# Altium PCB Booster_USER_IFC_W5500.PcbDoc (part 1 of 2)
Units mm, origin at the board's own origin, x right, y up, seen from the top; angles counter-clockwise.
Board outline 78 x 45 mm, 2 copper layers (Top Layer, Bottom Layer), stack 1.571 mm thick; 87 components, 93 nets, 348 pads, 108 vias.
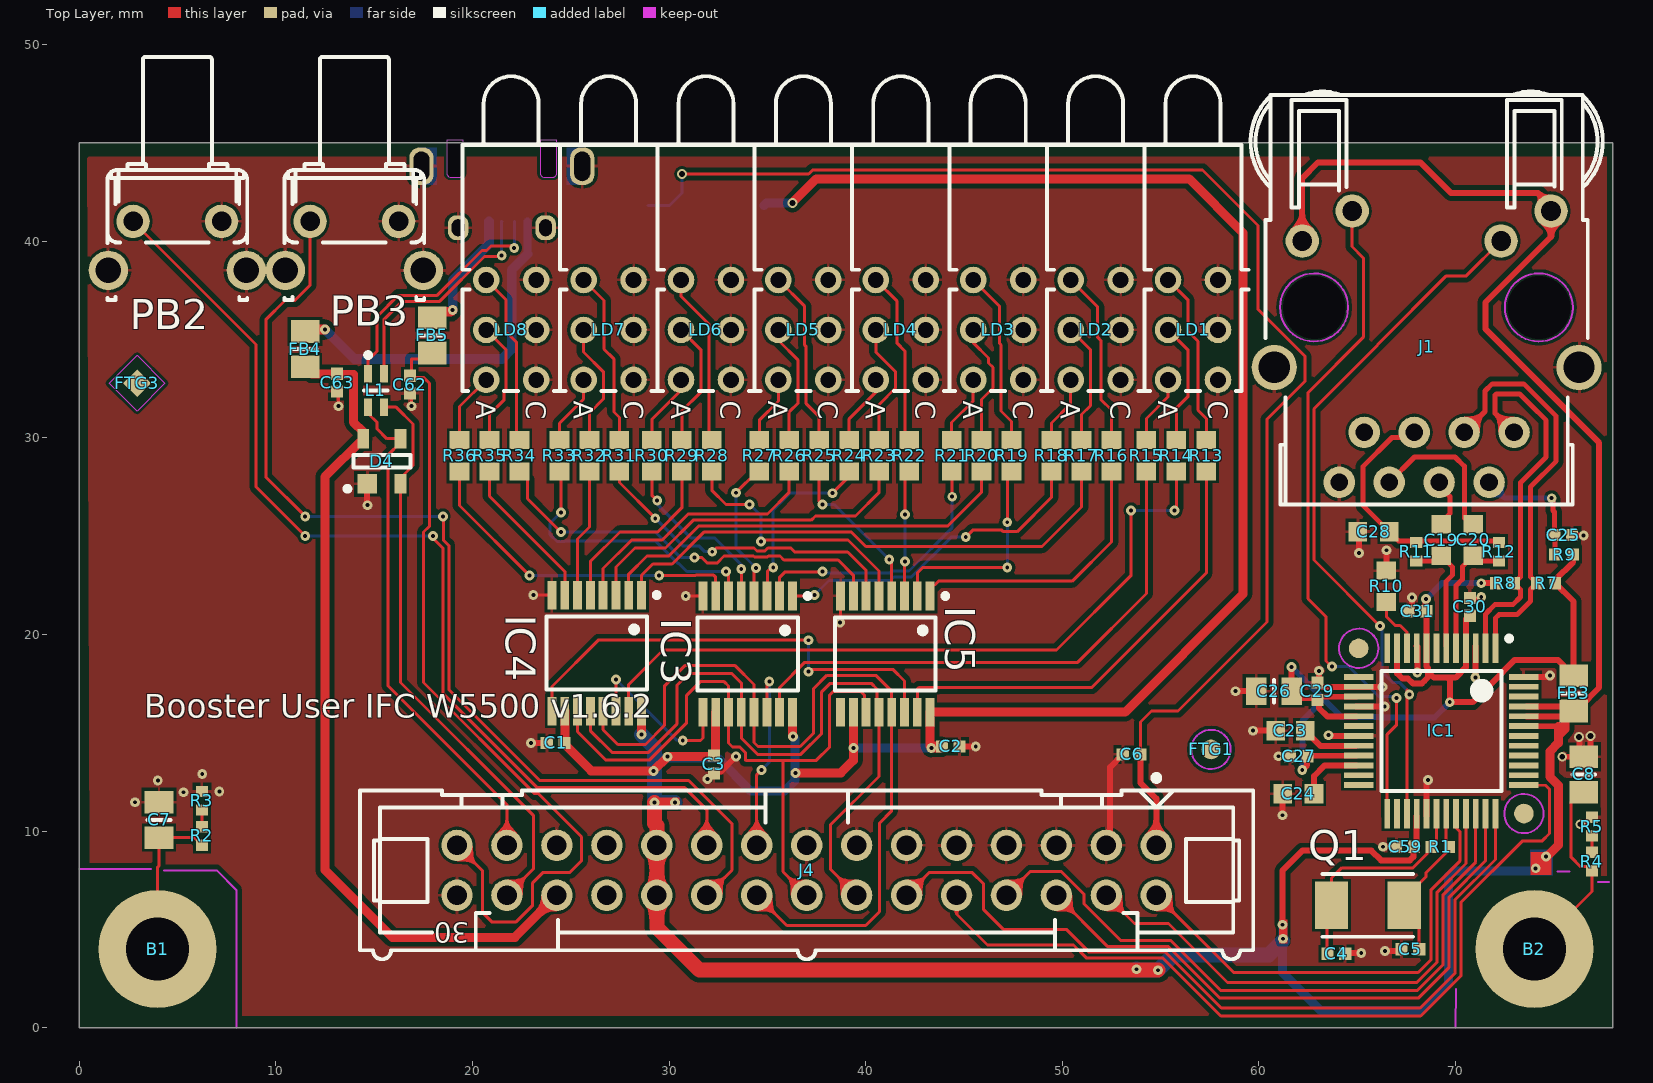
[diagram p0: Top Layer view]
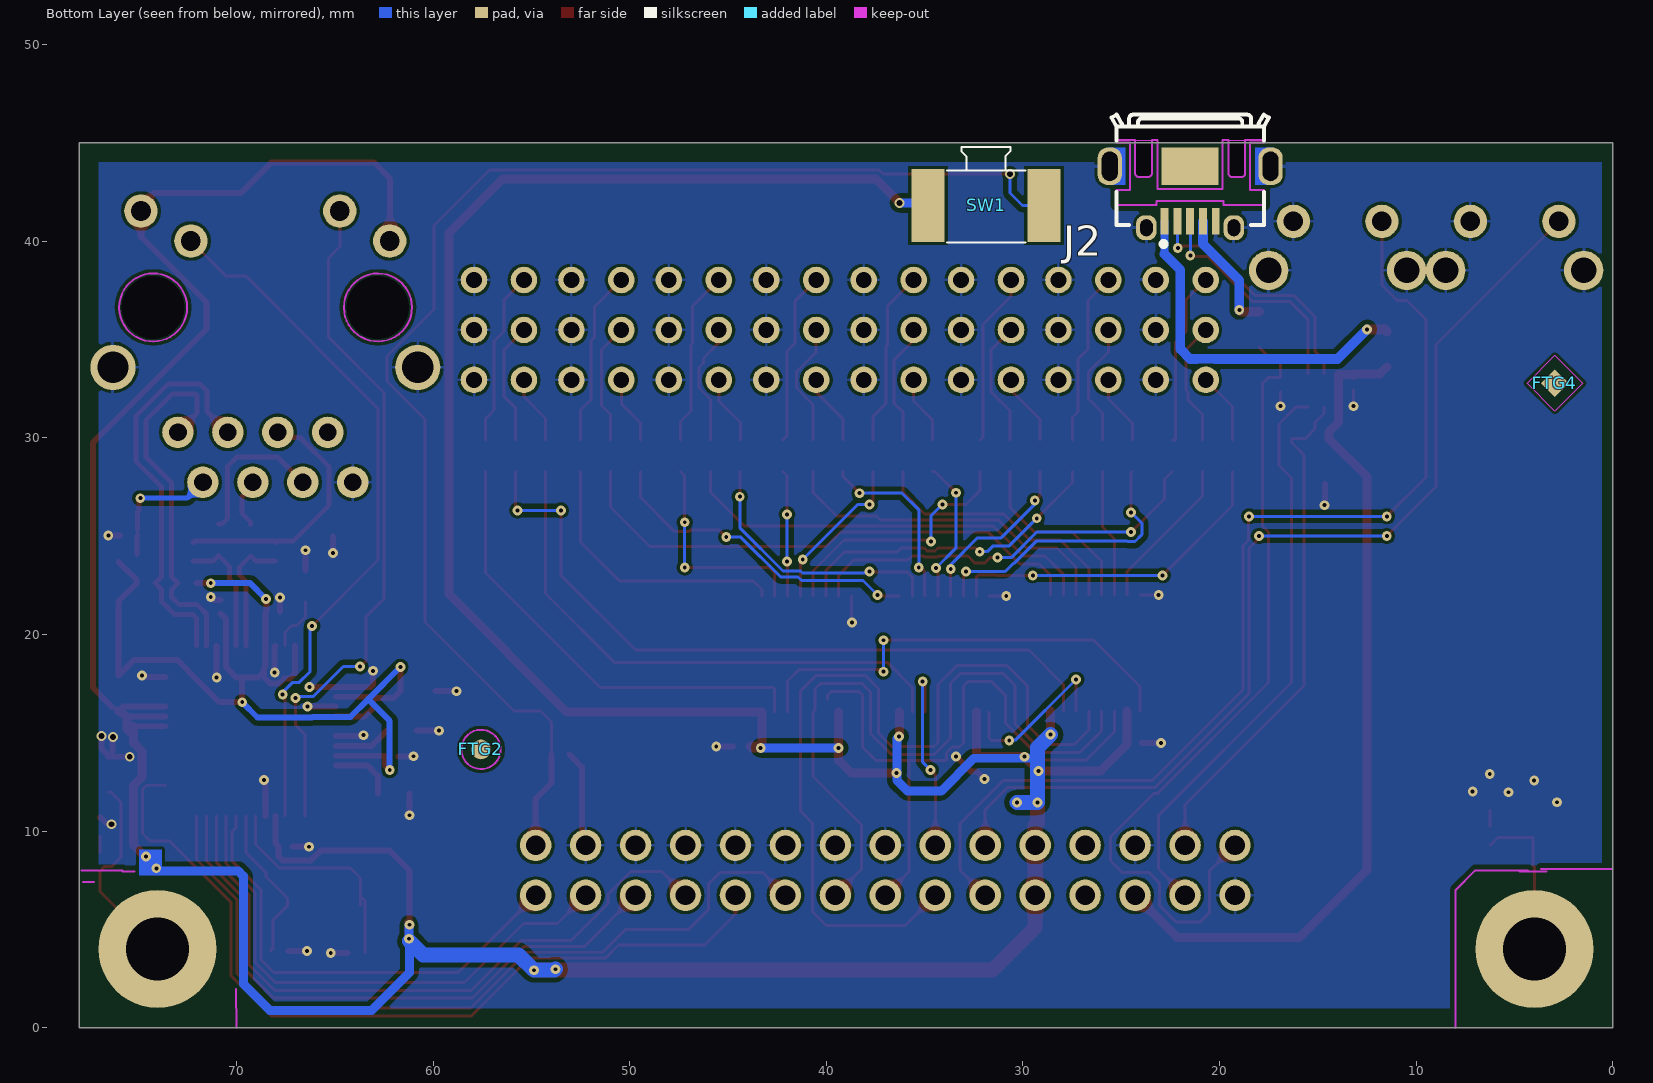
[diagram p1: Bottom Layer view, seen from below]
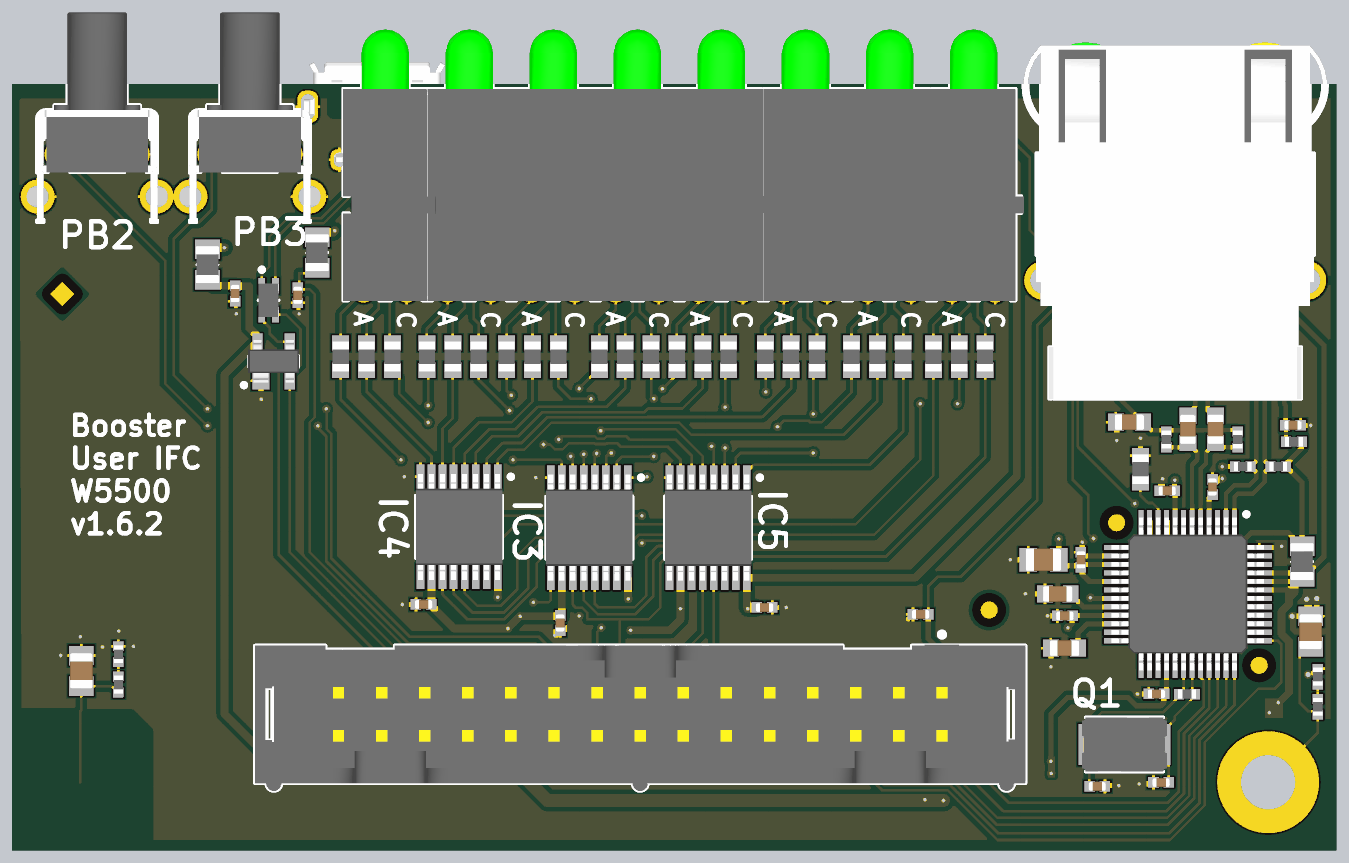
[diagram p2: 3D render of the assembled board from above, using the file's embedded part models]

## Layer stack, top to bottom
Top Solder: solder mask 0.0102, Solder Resist, Dk 3.5
Top Layer: signal copper 0.0356
Dielectric 1: dielectric 1.5, FR-4, Dk 4.8
Bottom Layer: signal copper 0.0356
Bottom Solder: solder mask 0.0102, Solder Resist, Dk 3.5

## Board outline
0,0 78,0 78,45 0,45

## Design rules (kind name [scope] priority, off if disabled: settings)
Clearance [All] p1: gap=0.152 ignorepadtopadclearanceinfootprint=FALSE except(0: Arc-Hole Track-Hole SMDPad-Hole THPad-Hole Via-Hole Fill-Hole Poly-Hole Region-Hole Text-Hole; 0.254: Track-Poly Poly-Poly)
DiffPairsRouting [All] p1: maxlimit=0.254 minlimit=0.254 mostfreqgap=0.254 toplayer_minwidth=0.254 toplayer_maxwidth=0.381 toplayer_prefwidth=0.381 bottomlayer_minwidth=0.254 bottomlayer_maxwidth=0.381 bottomlayer_prefwidth=0.381 maxuncoupledlength=12.7
HoleSize [All] p1: absolutevalues=TRUE maxlimit=5.08 minlimit=0.2 maxpercent=80.000 minpercent=20.000
MinimumSolderMaskSliver [All] p1: minsoldermaskwidth=0.025
PolygonConnect PolygonConnect_pad [IsPad] p1: connectstyle=Relief reliefconductorwidth=0.152 reliefentries=4 polygonreliefangle="90 Angle" airgapwidth=0.152
PolygonConnect [All] p2: connectstyle=Direct reliefconductorwidth=0.254 reliefentries=4 polygonreliefangle="45 Angle" airgapwidth=0.254
RoomDefinition Booster_USER_IFC_W5500 [InComponentClass('Booster_USER_IFC_W5500')] p1 off: confinementstyle=ConfineIn formatcopy=TRUE lockcomponents=FALSE outline 79.139,0.117 107.105,0.117 107.105,5.756 79.139,5.756
RoomDefinition U_LEDs [InComponentClass('U_LEDs')] p2 off: confinementstyle=ConfineIn formatcopy=TRUE lockcomponents=FALSE outline 81.557,48.796 10.818,48.796 10.818,-0.353 81.557,-0.353
RoomDefinition U_ETH_IFC [InComponentClass('U_ETH_IFC')] p3 off: confinementstyle=ConfineIn formatcopy=TRUE lockcomponents=FALSE outline 83.269,45.748 59,45.748 59,-0.861 83.269,-0.861
RoutingVias [All] p1: holewidth=0.711 width=0.5 viastyle="Through Hole" minholewidth=0.3 minwidth=0.5 maxholewidth=0.3 maxwidth=1.27
SilkToSilkClearance [All] p1: silktosilkclearance=0
SilkToSolderMaskClearance [IsPad] p1: minsilkscreentomaskgap=0 clearancetoexposedcopper=TRUE
SolderMaskExpansion [All] p1: expansion=0.102 istentingtop=FALSE
Width [All] p1: maxlimit=2.54 minlimit=0.152 preferedwidth=0.152
25 further rules are at their usual default settings.

## Classes and differential pairs
component class Booster_USER_IFC_W5500: B1 B2 C6 C7 C8 C62 C63 D4 FB4 FB5 FTG1 FTG2 FTG3 FTG4 J2 J4 L1 PB2 PB3 R2 R3 R4 R5 SW1
component class U_ETH_IFC: C4 C5 C19 C20 C23 C24 C25 C26 C27 C28 C29 C30 C31 C59 FB3 IC1 J1 Q1 R1 R7 R8 R9 R10 R11 R12
component class U_LEDs: C1 C2 C3 IC3 IC4 IC5 LD1 LD2 LD3 LD4 LD5 LD6 LD7 LD8 R13 R14 R15 R16 R17 R18 R19 R20 R21 R22 R23 R24 R25 R26 R27 R28 R29 R30 R31 R32 R33 R34 R35 R36
differential pair RJ45_TX: +RJ45_TX_P -RJ45_TX_N
differential pair RJ45_RX: +RJ45_RX_P -RJ45_RX_N
differential pair RJ45_RX_C: +RJ45_RX_C_P -RJ45_RX_C_N

## Components (designator, comment, footprint, x,y, rotation, side; value= is the part's Value field where it differs from the comment)
B1 "Plated Hole" MTG320_550#1 -7.214,2.032 r90 top
B2 "Plated Hole" MTG320_550#2 82.136,2.988 r90 top
C1 "100nF" CAPC1005X55N 24.235,14.478 r180 top
C2 "100nF" CAPC1005X55N 44.327,14.3 r0 top
C3 "100nF" CAPC1005X55N 32.287,13.386 r270 top
C4 "18pF" CAPC1005X55N 63.936,3.759 r180 top
C5 "18pF" CAPC1005X55N 67.695,3.988 r0 top
C6 "100nF" CAPC1005X55N 53.522,13.894 r0 top
C7 "100pF" CAPC2012X88N 4.068,10.566 r90 top
C8 "100pF" CAPC2012X88N 76.509,12.876 r90 top
C19 "10nF" CAPC1608X87N 69.27,24.793 r90 top
C20 "10nF" CAPC1608X87N 70.9,24.8 r90 top
C23 "4.7uF" CAPC1709X95N 61.6,15.1 r180 top
C24 "10nF" CAPC1608X87N 62,11.9 r0 top
C25 "100nF" CAPC1005X55N 75.467,25.044 r0 top
C26 "10uF" CAPC2012X135N 60.761,17.109 r180 top
C27 "100nF" CAPC1005X55N 62.024,13.8 r180 top
C28 "10nF" CAPC1608X87N 65.828,25.221 r0 top
C29 "100nF" CAPC1005X55N 62.971,17.109 r90 top
C30 "100nF" CAPC1005X55N 70.724,21.4 r90 top
C31 "100nF" CAPC1005X55N 68.051,21.173 r180 top
C59 "100nF" CAPC1005X55N 67.424,9.2 r180 top
C62 "100nF" CAPC1005X55N 16.824,32.7 r90 top
C63 "100nF" CAPC1005X55N 13.124,32.8 r90 top
D4 "PRTR5V0U2X" SOT190P230X110-4N 15.4,28.8 r90 top
FB3 "220R@100MHz" INDC2012X105N 76,17 r90 top
FB4 "220R@100MHz" INDC2012X105N 11.5,34.5 r90 top
FB5 "220R@100MHz" INDC2012X105N 17.962,35.204 r90 top
FTG1 "Use only in PCB" FIDUCIAL_TOP_C100-200 57.56,14.148 r90 top
FTG2 "Use only in PCB" FIDUCIAL_TOP_C100-200 57.56,14.148 r90 bottom
FTG3 "Use only in PCB" FIDUCIAL_TOP_S100-200 2.95,32.766 r90 top
FTG4 "Use only in PCB" FIDUCIAL_TOP_S100-200 2.95,32.766 r90 bottom
IC1 "W5500" QFP50P900X900X160-48N 69.27,15.088 r270 top
IC3 "SN74LV595APWT" SOP65P640X120-16N 34,19 r270 top
IC4 "SN74LV595APWT" SOP65P640X120-16N 26.325,19.05 r270 top
IC5 "SN74LV595APWT" SOP65P640X120-16N 41,19 r270 top
J1 "RJ45" TYCO_5-6605308-1 68.525,29 r180 top
J2 "Micro-USB AB 2.0" HIROSE_ZX62RD-AB-5P8 21.5,41 r0 bottom locked
J4 "" 3M_N2530-6002RB 37,8 r180 top locked
L1 "90R@100MHz" IND_MURATA_DLW21S 15.1,32.4 r270 top
LD1 "Red/Yellow/Green" LED_MENTOR_1882.2781 56.645,35.478 r270 top locked
LD2 "Red/Yellow/Green" LED_MENTOR_1882.2781 51.692,35.478 r270 top locked
LD3 "Red/Yellow/Green" LED_MENTOR_1882.2781 46.739,35.478 r270 top locked
LD4 "Red/Yellow/Green" LED_MENTOR_1882.2781 41.786,35.478 r270 top locked
LD5 "Red/Yellow/Green" LED_MENTOR_1882.2781 36.833,35.478 r270 top locked
LD6 "Red/Yellow/Green" LED_MENTOR_1882.2781 31.88,35.478 r270 top locked
LD7 "Red/Yellow/Green" LED_MENTOR_1882.2781 26.927,35.478 r270 top locked
LD8 "Red/Yellow/Green" LED_MENTOR_1882.2781 21.974,35.478 r270 top locked
PB2 "Push Button" PB_TYCO_1-1825027-1 5,41 r270 top
PB3 "Push Button" PB_TYCO_1-1825027-1 14,41 r270 top
Q1 "25MHz" XTAL_TXC_AA 65.536,6.223 r0 top
R1 "1M" RESC1005X40N 69.219,9.195 r0 top
R2 "1M" RESC1005X40N 6.252,9.75 r90 top
R3 "1M" RESC1005X40N 6.252,11.539 r90 top
R4 "1M" RESC1005X40N 76.929,8.442 r90 top
R5 "1M" RESC1005X40N 76.929,10.221 r90 top
R7 "49R9" RESC1005X40N 74.6,22.6 r0 top
R8 "49R9" RESC1005X40N 72.5,22.6 r180 top
R9 "10" RESC1005X40N 75.518,24.054 r180 top
R10 "12k4" RESC1608X55N 66.476,22.443 r90 top
R11 "49R9" RESC1005X40N 68,24.2 r270 top
R12 "49R9" RESC1005X40N 72.2,24.2 r270 top
R13 "330" RESC1608X55N 57.323,29.082 r90 top
R14 "330" RESC1608X55N 55.799,29.082 r90 top
R15 "330" RESC1608X55N 54.275,29.082 r90 top
R16 "330" RESC1608X55N 52.497,29.082 r90 top
R17 "330" RESC1608X55N 50.973,29.082 r90 top
R18 "330" RESC1608X55N 49.449,29.082 r90 top
R19 "330" RESC1608X55N 47.417,29.082 r90 top
R20 "330" RESC1608X55N 45.893,29.082 r90 top
R21 "330" RESC1608X55N 44.369,29.082 r90 top
R22 "330" RESC1608X55N 42.21,29.082 r90 top
R23 "330" RESC1608X55N 40.686,29.082 r90 top
R24 "330" RESC1608X55N 39.162,29.082 r90 top
R25 "330" RESC1608X55N 37.638,29.082 r90 top
R26 "330" RESC1608X55N 36.114,29.082 r90 top
R27 "330" RESC1608X55N 34.59,29.082 r90 top
R28 "330" RESC1608X55N 32.177,29.082 r90 top
R29 "330" RESC1608X55N 30.653,29.082 r90 top
R30 "330" RESC1608X55N 29.129,29.082 r90 top
R31 "330" RESC1608X55N 27.478,29.082 r90 top
R32 "330" RESC1608X55N 25.954,29.082 r90 top
R33 "330" RESC1608X55N 24.43,29.082 r90 top
R34 "330" RESC1608X55N 22.398,29.082 r90 top
R35 "330" RESC1608X55N 20.874,29.082 r90 top
R36 "330" RESC1608X55N 19.35,29.082 r90 top
SW1 "KSS241G LFS" "KSS241G LFS" 31.881,41.808 r0 bottom locked

## Footprints (in the part's own frame and the unit in brackets; to place one, negate y for a bottom-side part, rotate by r counter-clockwise, add the part's x,y. Pads: shape width x height; smd on the part's side, far side on the other; paste and mask are expansions set on the pad)
3M_N2530-6002RB [mm] "30 Contacts - Straight .100\" x .100\" Low Profile Four-Wall Header"
  round 1.6 hole 1: 1(-17.78,-1.27) 2(-17.78,1.27) 3(-15.24,-1.27) 4(-15.24,1.27) 5(-12.7,-1.27) 6(-12.7,1.27) 7(-10.16,-1.27) 8(-10.16,1.27) 9(-7.62,-1.27) 10(-7.62,1.27) 11(-5.08,-1.27) 12(-5.08,1.27) 13(-2.54,-1.27) 14(-2.54,1.27) 15(0,-1.27) 16(0,1.27) 17(2.54,-1.27) 18(2.54,1.27) 19(5.08,-1.27) 20(5.08,1.27) 21(7.62,-1.27) 22(7.62,1.27) 23(10.16,-1.27) 24(10.16,1.27) 25(12.7,-1.27) 26(12.7,1.27) 27(15.24,-1.27) 28(15.24,1.27) 29(17.78,-1.27) 30(17.78,1.27)
  silkscreen extent -22.71,-4.85 22.71,4.52, body extent -22.71,-4.11 22.71,4.52, height 9.91
CAPC1005X55N [mm] "Chip Capacitor, Body 1.0x0.55mm, IPC Medium Density"
  rect 0.62x0.62 smd: 1(-0.45,0) 2(0.45,0)
  body extent -0.52,-0.27 0.53,0.28, height 0.55
CAPC1608X87N [mm] "Chip Capacitor, Body 1.6x0.8mm IPC Medium Density"
  rect 0.95x1 smd: 1(-0.8,0) 2(0.8,0)
  body extent -0.87,-0.47 0.88,0.48, height 0.87
CAPC1709X95N [mm] "Capacitor, non-Polarized, Chip; 1.65mm L X 0.85mm W X 0.95mm H,IPC Medium Density"
  rect 0.95x1 smd: 1(-0.75,0) 2(0.75,0)
  body extent -0.87,-0.47 0.88,0.48, height 0.95
CAPC2012X88N [mm] "Chip Capacitor, Body 2.0x1.25mm, IPC Medium Density"
  rect 1.15x1.45 smd: 1(-0.9,0) 2(0.9,0)
  silkscreen extent 0,-0.58 0,0.58, body extent -1.05,-0.67 1.05,0.68, height 0.9
CAPC2012X135N [mm] "Chip Capacitor, Body 2.0x1.25mm, IPC Medium Density"
  rect 1.05x1.4 smd: 1(-0.9,0) 2(0.9,0)
  silkscreen extent 0,-0.58 0,0.58, body extent -1.05,-0.67 1.05,0.68, height 1.25
FIDUCIAL_TOP_C100-200 [mm] "Round Fiducial Target, Top Layer, 1.0mm, Top Solder 2.0mm, Keepout =2.0mm"
  round 1 smd paste-0.51 mask+0.5: FTG2(0,0)
  Top Layer keep-out circle w0.1: c0,0 r1
FIDUCIAL_TOP_S100-200 [mm] "Square Fiducial Target, Top Layer, 1.0mm, Top Solder 2.0mm, Keepout =2.0mm"
  rect 1x1 smd rot 45 paste-0.51 mask+0.5: 1(0,0)
  Top Layer keep-out region: 1.414,0 0,-1.414 -1.414,0 0,1.414
HIROSE_ZX62RD-AB-5P8 [mm] "Right Angle, SMD Micro-USB Type AB - Reverse (Top mount), Shell Through Hole"
  rect 0.4x1.35 smd: 1(1.3,0) 2(0.65,0) 3(0,0) 4(-0.65,0) 5(-1.3,0)
  rrect80% 1.225x1.9 hole 0.8 slot 1.5 at 90 deg: 6(-4.088,-2.8) 6(4.088,-2.8)
  rrect80% 1.05x1.25 hole 0.65 slot 0.85 at 90 deg: 6(-2.225,0.325) 6(2.225,0.325)
  rect 2.9x1.9 smd: PastePad(0,-2.8)
  Top Layer region: 4.2,-3.75 4.2,-1.85 3.3,-1.85 3.3,-1.85 3.3,-3.75
  Top Layer region: -4.2,-1.85 -4.2,-3.75 -3.3,-3.75 -3.3,-3.75 -3.3,-1.85
  Top Layer keep-out lines w0.1: -3.75,-0.825 -1.7,-0.825 -1.7,-1.025 1.7,-1.025 1.7,-0.825 3.75,-0.825 3.75,-1.6 3.05,-1.6 3.05,-4 3.75,-4 3.75,-4.125 2.8,-4.125 2.8,-2.45 ccw(c2.6,-2.45) 2.6,-2.25 2.15,-2.25 ccw(c2.15,-2.45) 1.95,-2.45 1.95,-4.125 1.65,-4.125 1.65,-1.65 -1.65,-1.65 -1.65,-4.125 -1.95,-4.125 -1.95,-2.45 ccw(c-2.15,-2.45) -2.15,-2.25 -2.6,-2.25 ccw(c-2.6,-2.45) -2.8,-2.45 -2.8,-4.125 -3.75,-4.125 -3.75,-4 -3.05,-4 -3.05,-1.6 -3.75,-1.6 -3.75,-0.825
  Keep-Out Layer board cut-out: -2.8,-4.125 -2.8,-2.45 -2.785,-2.373 -2.741,-2.309 -2.676,-2.265 -2.6,-2.25 -2.6,-2.25 -2.15,-2.25 -2.073,-2.265 -2.009,-2.309 -1.965,-2.373 -1.95,-2.45 -1.95,-2.45 -1.95,-4.125
  Keep-Out Layer board cut-out: 1.95,-4.125 1.95,-2.45 1.965,-2.373 2.009,-2.309 2.074,-2.265 2.15,-2.25 2.15,-2.25 2.6,-2.25 2.677,-2.265 2.741,-2.309 2.785,-2.373 2.8,-2.45 2.8,-2.45 2.8,-4.125
  silkscreen extent -4,-5.42 4,1.27, body extent -4.32,-5.42 4.33,0.47, height 2.78
IND_MURATA_DLW21S [mm] "Common Mode Choke Coil, DLW21S Series - Body 2 x 1.2mm"
  rect 0.9x0.4 smd: 1(-0.85,-0.4) 2(0.85,-0.4) 3(0.85,0.4) 4(-0.85,0.4)
  silkscreen extent -1.92,-0.6 0,0.6, body extent -1,-0.6 1,0.6, height 1.4
INDC2012X105N [mm] "Chip Inductor, EIA 0805, Metric 2012, Body 2.0x1.25mm, IPC Medium Density"
  rect 1.15x1.45 smd: 1(-0.9,0) 2(0.9,0)
  silkscreen extent 0,-0.6 0,0.6, body extent -1.1,-0.7 1.1,0.7, height 1.1
"KSS241G LFS" [mm]
  rect 1.7x3.7 smd: 1(-2.95,0) 2(2.95,0)
  silkscreen extent -2,-2.98 1.97,1.88, body extent -3.6,-2.98 3.6,1.7, height 1.65
LED_MENTOR_1882.2781 [mm] "3x LED 3mm (Red+Yellow +Green) PCB Edge Mounting MENTOR 1882.2781"
  round 1.35 hole 0.8: 1(-2.54,1.27) 2(-2.54,-1.27) 3(0,1.27) 4(0,-1.27) 5(2.54,1.27) 6(2.54,-1.27)
  silkscreen extent -12.9,-2.47 3.1,2.83, body extent -12.88,-2.47 3.12,2.98, height 12
MTG320_550#1 [mm] "Plated Through Hole: Hole Dia.=3.2mm Pad Dia.=5.5mm"
  round 6 hole 3.2: 1(1.968,-11.214)
MTG320_550#2 [mm] "Plated Through Hole: Hole Dia.=3.2mm Pad Dia.=5.5mm"
  round 6 hole 3.2: 1(1.012,8.136)
PB_TYCO_1-1825027-1 [mm] "Right Angle Micro Miniature Tactile Pushbutton Switche, Round Actuator Length = 5.74mm, FSMRAJ Serie"
  round 1.7 hole 1: 1(0,-2.25) 2(0,2.25)
  round 2 hole 1.3: 3(2.49,-3.505) 4(2.49,3.505)
  silkscreen extent -8.36,-3.56 4,3.56, body extent -8.36,-4.2 4,4.2, height 7.01
QFP50P900X900X160-48N [mm] "QFP, 0.50mm pitch, square, 12 pin X 12 pin, 7.00mm X 7.00mm X 1.60mm Body, IPC Medium Density"
  rect 1.5x0.3 smd: 1(-4.2,2.75) 2(-4.2,2.25) 3(-4.2,1.75) 4(-4.2,1.25) 5(-4.2,0.75) 6(-4.2,0.25) 7(-4.2,-0.25) 8(-4.2,-0.75) 9(-4.2,-1.25) 10(-4.2,-1.75) 11(-4.2,-2.25) 12(-4.2,-2.75) 25(4.2,-2.75) 26(4.2,-2.25) 27(4.2,-1.75) 28(4.2,-1.25) 29(4.2,-0.75) 30(4.2,-0.25) 31(4.2,0.25) 32(4.2,0.75) 33(4.2,1.25) 34(4.2,1.75) 35(4.2,2.25) 36(4.2,2.75)
  rect 0.3x1.5 smd: 13(-2.75,-4.2) 14(-2.25,-4.2) 15(-1.75,-4.2) 16(-1.25,-4.2) 17(-0.75,-4.2) 18(-0.25,-4.2) 19(0.25,-4.2) 20(0.75,-4.2) 21(1.25,-4.2) 22(1.75,-4.2) 23(2.25,-4.2) 24(2.75,-4.2) 37(2.75,4.2) 38(2.25,4.2) 39(1.75,4.2) 40(1.25,4.2) 41(0.75,4.2) 42(0.25,4.2) 43(-0.25,4.2) 44(-0.75,4.2) 45(-1.25,4.2) 46(-1.75,4.2) 47(-2.25,4.2) 48(-2.75,4.2)
  round 1 smd paste-0.51 mask+0.5: FTG1(-4.2,-4.2) FTG2(4.2,4.2)
  Top Layer keep-out circle w0.1: c4.2,4.2 r1
  Top Layer keep-out circle w0.1: c-4.2,-4.2 r1
  silkscreen extent -4.82,-3.05 3.05,3.58, body extent -4.5,-4.5 4.5,4.5, height 1.6
RESC1005X40N [mm] "Chip Resistor, EIA 0402, Metric 1005, Body 1.0x0.5mm, IPC Medium Density"
  rect 0.58x0.62 smd: 1(-0.47,0) 2(0.47,0)
  body extent -0.52,-0.27 0.53,0.28, height 0.4
RESC1608X55N [mm] "Chip Resistor, EIA 0603, Metric 1608, Body 1.6x0.8mm, IPC Medium Density"
  rect 0.9x1 smd: 1(-0.8,0) 2(0.8,0)
  body extent -0.87,-0.47 0.88,0.48, height 0.55
SOP65P640X120-16N [mm] "SOP, 0.65mm pitch; 16 pin, 4.40mm W X 5.00mm L X 1.20mm H body IPC Medium Density"
  rect 1.45x0.45 smd: 1(-2.95,2.275) 2(-2.95,1.625) 3(-2.95,0.975) 4(-2.95,0.325) 5(-2.95,-0.325) 6(-2.95,-0.975) 7(-2.95,-1.625) 8(-2.95,-2.275) 9(2.95,-2.275) 10(2.95,-1.625) 11(2.95,-0.975) 12(2.95,-0.325) 13(2.95,0.325) 14(2.95,0.975) 15(2.95,1.625) 16(2.95,2.275)
  silkscreen extent -3.07,-2.55 1.85,3.17, body extent -3.12,-2.55 3.12,2.55, height 1.2
SOT190P230X110-4N [mm] "SOT143, SOT, 1.90mm Pitch; 4 Pin, 1.30mm W X 2.90mm L X 1.10mm H body, IPC Medium Density"
  rect 1x1 smd: 1(-1.15,0.75)
  rect 1x0.6 smd: 2(-1.15,-0.95) 3(1.15,-0.95) 4(1.15,0.95)
  silkscreen extent -1.52,-1.45 0.33,1.87, body extent -1.25,-1.5 1.25,1.5, height 1.1
TYCO_5-6605308-1 [mm] "1 Port, Yellow/Green LEDs, RJ45 10/100Base-T Ethernet, Mag45 Connector Module With Integrated Magnetics"
  round 1.6 hole 0.9: 1(-4.445,-1.27) 2(-3.175,1.27) 3(-1.905,-1.27) 4(-0.635,1.27) 5(0.635,-1.27) 6(1.905,1.27) 7(3.175,-1.27) 8(4.445,1.27)
  round 2.3 hole 1.6: 9(-7.747,-4.572) 10(7.747,-4.572)
  round 1.7 hole 1: D1(-6.325,-12.522) D2(-3.785,-10.998) D3(6.325,-10.998) D4(3.785,-12.522)
  round 0.5 hole 3.2 unplated mask+1.35: M1(-5.715,-7.62) M2(5.715,-7.62)
  silkscreen extent -8.95,-18.59 8.95,2.41, body extent -8.95,-18.6 8.95,2.41, height 14.97
XTAL_TXC_AA [mm] "2 Pins, 3.2x5mm, SMD Glass Sealing Crystal, AA Series"
  rect 1.7x2.4 smd: 1(-1.85,0) 2(1.85,0)
  silkscreen extent -2.3,-1.6 2.3,1.6, body extent -2.5,-1.6 2.5,1.6, height 1.2

## Part data
B1 B2: library part PLATED_HOLE3.2_PAD5.5, "Single Terminal Socket", Author="CERN DEM JMW", Component Type="Standard (No BOM)", ComponentHeight=0mm, CreateDate=01.10.2012, Family="Plated Hole", HelpURL=Undefined, LatestRevisionDate=01.10.2012, Mounted=No, PackageDescription="Plated Through Hole: Hole Dia.=3.2mm Pad Dia.=5.5mm", Part Description="Plated Through Hole: Hole Dia.=3.2mm Pad Dia.=5.5mm", Part Number=PLATED_HOLE3.2_PAD5.5, Pin Count=1, Sense=No, SMD=No, Socket=No, Status=None
C1 C2 C3 C6 C25 C27 C29 C30 C31 C59 C62 C63: library part CC0402_100NF_16V_10%_X7R, "Non-polarised capacitor", Case=0402, Manufacturer=GENERIC, Manufacturer1 ComponentHeight=0.55mm, Manufacturer1 Example=MURATA, Manufacturer1 Part Number=GRM155R71C104KA88D, Tolerance=±10%, Voltage=16V, Author="CERN DEM JLC", Component Type=Standard, CreateDate=05.12.2013, HelpURL=\\cern.ch\dfs\Applications\Altium\Datasheets\CC0402_X7R_MURATA_GRM.pdf, LatestRevisionDate=03.12.2007, Manufacturer Part Number=CC0402_100NF_16V_10%_X7R, Mounted=Yes, Part Description="SMD Multilayer Chip Ceramic Capacitor", Part Number=CC0402_100NF_16V_10%_X7R, Pin Count=2, Sense=No, SMD=Yes, Socket=No, Status="Not Recommended", TC=X7R
C4 C5: library part CC0402_18PF_50V_5%_C0G, "Non-polarised capacitor", Case=0402, Manufacturer=GENERIC, Manufacturer1 ComponentHeight=0.55mm, Manufacturer1 Example=KEMET, Manufacturer1 Part Number=C0402C180J5GACTU, Tolerance=±5%, Voltage=50V, Author="CERN DEM JLC", Component Type=Standard, CreateDate=04.10.2016, HelpURL="\\cern.ch\dfs\Applications\Altium\Datasheets\CC0402_C0G_KEMET_(Commercial Grade).pdf", LatestRevisionDate=04.10.2016, Manufacturer Part Number=CC0402_18PF_50V_5%_C0G, Mounted=Yes, Part Description="SMD Multilayer Chip Ceramic Capacitor", Part Number=CC0402_18PF_50V_5%_C0G, Pin Count=2, Sense=No, SMD=Yes, Socket=No, Status=Preferred, TC=C0G/NP0
C7 C8: library part CC0805_100PF_200V_5%_C0G, "Non-polarised capacitor", Case=0805, Manufacturer=GENERIC, Manufacturer1 ComponentHeight=0.88mm, Manufacturer1 Example=KEMET, Manufacturer1 Part Number=C0805C101J2GACTU, Tolerance=±5%, Voltage=200V, Author="CERN DEM JLC", Component Type=Standard, CreateDate=23.09.2014, HelpURL="\\cern.ch\dfs\Applications\Altium\Datasheets\CC0805_C0G_KEMET_(Commercial Grade).pdf", LatestRevisionDate=23.09.2014, Manufacturer Part Number=CC0805_100PF_200V_5%_C0G, Mounted=Yes, Part Description="SMD Multilayer Chip Ceramic Capacitor", Part Number=CC0805_100PF_200V_5%_C0G, Pin Count=2, Sense=No, SMD=Yes, Socket=No, Status=Preferred, TC=C0G/NP0
C19 C20 C24 C28: library part CC0603_10NF_50V_5%_C0G, "Non-polarised capacitor", Case=0603, Manufacturer=GENERIC, Manufacturer1 ComponentHeight=0.9mm, Manufacturer1 Example=TDK, Manufacturer1 Part Number=C1608C0G1H103J080AA, Tolerance=±5%, Voltage=50V, Author="CERN DEM JLC", Component Type=Standard, CreateDate=10.12.2014, HelpURL=\\cern.ch\dfs\Applications\Altium\Datasheets\CC0603_C0G_TDK_C.pdf, LatestRevisionDate=10.12.2014, Manufacturer Part Number=CC0603_10NF_50V_5%_C0G, Mounted=Yes, Part Description="SMD Multilayer Chip Ceramic Capacitor", Part Number=CC0603_10NF_50V_5%_C0G, Pin Count=2, Sense=No, SMD=Yes, Socket=No, Status=Preferred, TC=C0G/NP0
C23: library part CC0603_4.7UF_16V_10%_X5R, "Non-polarised capacitor", Case=0603, Manufacturer=GENERIC, Manufacturer1 ComponentHeight=0.95mm, Manufacturer1 Example="TAIYO YUDEN", Manufacturer1 Part Number=EMK107ABJ475KA-T, Tolerance=±10%, Voltage=16V, Author="CERN DEM JLC", Component Type=Standard, CreateDate=16.12.2013, HelpURL=\\cern.ch\dfs\Applications\Altium\Datasheets\CC0603_X7R_TAIYO-YUDEN_HIGH-VALUE.pdf, LatestRevisionDate=16.09.2014, Manufacturer Part Number=CC0603_4.7UF_16V_10%_X5R, Mounted=Yes, Part Description="SMD Multilayer Chip Ceramic Capacitor", Part Number=CC0603_4.7UF_16V_10%_X5R, Pin Count=2, Sense=No, SMD=Yes, Socket=No, Status=None, TC=X5R
C26: library part CC0805_10UF_10V_10%_X7R, "Non-polarised capacitor", Case=0805, Manufacturer=GENERIC, Manufacturer1 ComponentHeight=1.35mm, Manufacturer1 Example=MURATA, Manufacturer1 Part Number=GRM21BR71A106KE51L, Tolerance=±10%, Voltage=10V, Author="CERN DEM JLC", Component Type=Standard, CreateDate=2012-04-30, HelpURL=\\cern.ch\dfs\Applications\Altium\Datasheets\CC0805_X7R_MURATA.pdf, LatestRevisionDate=2012-04-30, Manufacturer Part Number=CC0805_10UF_10V_10%_X7R, Mounted=Yes, Part Description="SMD Multilayer Chip Ceramic Capacitor", Part Number=CC0805_10UF_10V_10%_X7R, Pin Count=2, SMD=Yes, Socket=No, Status=Preferred, Table="Capacitors SMD", TC=X7R
D4: "Ultra Low Capacitance Double Rail-to-Rail ESD Protection Diode", Case=SOT143B, Manufacturer="NXP SEMICONDUCTORS", Voltage=5.5V, Author="CERN DEM JLC", Bonding=No, ComponentHeight=1.1mm, Component Type=Standard, CreateDate=22.03.2011, Device=PRTR5V0U2X, HelpURL=\\cern.ch\dfs\Applications\Altium\Datasheets\PRTR5V0U2X.pdf, LatestRevisionDate=22.03.2011, Manufacturer Part Number=PRTR5V0U2X, Mounted=Yes, PackageDescription="SOT143B, SOT, 1.90mm Pitch; 4 Pin, 1.30mm W X 2.90mm L X 1.10mm H body, IPC Medium Density", Part Description="Ultra Low Capacitance (1pF) Double Rail-to-Rail ESD Protection Diode (8kV)", Part Number=PRTR5V0U2X, Pin Count=4, PressFit=No, Sense=No, SMD=Yes, Socket=No
FB3 FB4 FB5: library part IND0805_MURATA_BLM21PG221SN1D, "Inductor", Case=0805, Manufacturer=MURATA, Manufacturer Part Number=BLM21PG221SN1D, Power=2A, Resistance=0.05R, Tolerance=±25%, Author="CERN DEM JLC", ComponentHeight=1.05mm, Component Type=Standard, CreateDate=2010-01-25, HelpURL=\\cern.ch\dfs\Applications\Altium\Datasheets\IND0402_MURATA_BLM21P.pdf, LatestRevisionDate=2010-01-25, Mounted=Yes, Part Description="SMD EMIFIL Suppression Chip Ferrite Bead", Part Number=IND0805_MURATA_BLM21PG221SN1D, Pin Count=2, SMD=Yes, Socket=No, Status=None, Table="Inductors SMD"
FTG1 FTG2: library part FIDUCIAL_TARGET_C100-200, "Fiducial Target", Author="CERN DEM JLC", Component Type="Standard (No BOM)", ComponentHeight=0mm, CreateDate=09.02.2010, Family=Fiducial, HelpURL=Undefined, LatestRevisionDate=04.04.2012, Mounted=No, PackageDescription="Round Fiducial Target, Top Layer, 1.0mm, Top Solder 2.0mm, Keepout =2.0mm", Part Description="Round Fiducial Target, Top Layer, 1.0mm, Top Solder 2.0mm, Keepout =2.0mm", Part Number=FIDUCIAL_TARGET_C100-200, Pin Count=1, Sense=No, SMD=Yes, Socket=No, Status=None
FTG3 FTG4: library part FIDUCIAL_TARGET_S100-200, "Fiducial Target", Author="CERN DEM JLC", Component Type="Standard (No BOM)", ComponentHeight=0mm, CreateDate=09.02.2010, Family=Fiducial, HelpURL=Undefined, LatestRevisionDate=04.04.2012, Mounted=No, PackageDescription="Square Fiducial Target, Top Layer, 1.0mm, Top Solder 2.0mm, Keepout =2.0mm", Part Description="Square Fiducial Target, Top Layer, 1.0mm, Top Solder 2.0mm, Keepout =2.0mm", Part Number=FIDUCIAL_TARGET_S100-200, Pin Count=1, Sense=No, SMD=Yes, Socket=No, Status=None
IC1: "iEthernet W5500 TCP/IP Performance and High Speed SPI Ethernet Controller", Case=QFP48, Manufacturer=WIZNET, Author="CERN DEM MR", Bonding=No, ComponentHeight=1.6mm, Component Type=Standard, CreateDate=15.02.2018, Device=W5500, HelpURL=\\cern.ch\dfs\Applications\Altium\Datasheets\W5500.pdf, LatestRevisionDate=15.02.2018, Manufacturer Part Number=W5500, Mounted=Yes, PackageDescription="QFP, 0.50mm Pitch, Square, 48 Pin, 7.00mm L X 7.00mm W X 1.60mm H Body, IPC Medium Density", Part Description="iEthernet W5500 TCP/IP Performance and High Speed SPI Ethernet Controller", Part Number=W5500, Pin Count=48, PressFit=No, Sense=No, SMD=Yes, Socket=No
IC3 IC4 IC5: "8-Bit Shift Register With 3-State Output Register", Case=TSSOP16, Manufacturer="TEXAS INSTRUMENTS", Author="CERN DEM JLC", Bonding=No, ComponentHeight=1.2mm, Component Type=Standard, CreateDate=10.05.2012, Device=SN74LV595APWT, HelpURL=\\cern.ch\dfs\Applications\Altium\Datasheets\SN74LV595APWT.pdf, LatestRevisionDate=10.05.2012, Manufacturer Part Number=SN74LV595APWT, Mounted=Yes, PackageDescription="SOP, 0.65mm pitch; 16 pin, 4.40mm W X 5.00mm L X 1.20mm H body IPC Medium Density", Part Description="8-Bit Shift Register With 3-State Output Register", Part Number=SN74LV595APWT, Pin Count=16, PressFit=No, Sense=No, SMD=Yes, Socket=No
J1: library part TYCO_5-6605308-1, "1 Port, Yellow/Green LEDs, RJ45 10/100Base-T Ethernet, Mag45 Connector Module With Integrated Magnetics", Manufacturer="TYCO ELECTRONICS", Manufacturer Part Number=5-6605308-1, Author="CERN DEM JLC", ComponentHeight=15.24mm, Component Type=Standard, CreateDate=23.08.2012, Family=RJ45, HelpURL=\\cern.ch\dfs\Applications\Altium\Datasheets\TYCO_5-6605308-1.pdf, LatestRevisionDate=23.08.2012, Mounted=Yes, Part Description="1 Port, Yellow/Green LEDs, RJ45 10/100Base-T Ethernet, Mag45 Connector Module With Integrated Magnetics", Part Number=TYCO_5-6605308-1, Pin Count=14, PressFit=No, Sense=No, SMD=No, Socket=No, Status=None
J2: library part HIROSE_ZX62RD-AB-5P8, "5 Pin + 1 Shield USB Receptacle", Manufacturer="HIROSE (HRS)", Manufacturer Part Number=ZX62RD-AB-5P8, Author="CERN DEM JLC", ComponentHeight=2.35mm, ComponentLink1Description=Package-Drawing, ComponentLink1URL=\\cern.ch\dfs\Applications\Altium\Datasheets\HIROSE_ZX62RD-AB-5P8_Package-Drawing.pdf, Component Type=Standard, CreateDate=29.10.2014, Family="Micro-USB AB 2.0", HelpURL=\\cern.ch\dfs\Applications\Altium\Datasheets\HIROSE_ZX62RD-AB-5P8.pdf, LatestRevisionDate=29.10.2014, Mounted=Yes, Part Description="Micro-USB 2.0 Right Angle, SMD Type AB - Reverse (Top mount), Shell Through Hole", Part Number=HIROSE_ZX62RD-AB-5P8, Pin Count=7, PressFit=No, Sense=No, SMD=Yes, Socket=No, Status=None
J4: library part 3M_N2530-6002RB, "Connector 30 Male", Manufacturer=3M, Manufacturer Part Number=N2530-6002RB, Author="CERN DEM JLC", ComponentHeight=10.03mm, Component Type=Standard, CreateDate=11.02.2009, Family="Header 30", HelpURL=\\cern.ch\dfs\Applications\Altium\Datasheets\3M_N2530-6002RB.pdf, LatestRevisionDate=11.08.2009, Mounted=Yes, Part Description="30 Contacts - Straight .100'' x .100'' Low Profile Four-Wall Header, 2500 Series", Part Number=3M_N2530-6002RB, Pin Count=30, PressFit=No, Sense=No, SMD=No, Socket=No, Status=None
L1: library part IND_MURATA_DLW21SN900SQ2L, "Inductor Common Mode", Case=0805, Manufacturer=MURATA, Manufacturer Part Number=DLW21SN900SQ2L, Power=330mA, Resistance=0.35R, Tolerance=±25%, Author="CERN DEM JLC", ComponentHeight=1.4mm, Component Type=Standard, CreateDate=01.07.2014, HelpURL=\\cern.ch\dfs\Applications\Altium\Datasheets\IND_MURATA_DLW21S.pdf, LatestRevisionDate=01.07.2014, Mounted=Yes, Part Description="Wire Wound Common Mode Choke Coil (DLW21S Series)", Part Number=IND_MURATA_DLW21SN900SQ2L, Pin Count=4, Sense=No, SMD=Yes, Socket=No, Status=None
LD1 LD2 LD3 LD4 LD5 LD6 LD7 LD8: library part LED_MENTOR_1882.2781, "LED x3 G-1C2A-BOT_Y-3C4A_R-5C6A-TOP", Manufacturer=MENTOR, Manufacturer Part Number=1882.2781, Author="CERN DEM JLC", Bonding=No, Color=Red/Yellow/Green, ComponentHeight=12mm, Component Type=Standard, CreateDate=03.02.2009, HelpURL=\\cern.ch\dfs\Applications\Altium\Datasheets\LED_MENTOR_1882.2781.pdf, LatestRevisionDate=17.03.2010, Mounted=Yes, PackageDescription="3x LED 3mm (Red+Yellow +Green) PCB Edge Mounting MENTOR 1882.2781", Part Description="Triple 3mm LEDs, Red Top, Yellow Mid, Green Bot, PCB Edge Mounting", Part Number=LED_MENTOR_1882.2781, Pin Count=6, PressFit=No, Sense=No, SMD=No, Socket=No
PB2 PB3: library part PB_TYCO_1-1825027-1, "Push-Button Switch SPDT", Manufacturer="TYCO ELECTRONICS", Manufacturer Part Number=1-1825027-1, Author="CERN DEM JLC", ComponentHeight=7.01mm, Component Type=Standard, CreateDate=17.04.2013, Family="Push Button", HelpURL=\\cern.ch\dfs\Applications\Altium\Datasheets\PB_TYCO_1-1825027-1.pdf, LatestRevisionDate=28.10.2013, Mounted=Yes, PackageDescription="Right Angle Micro Miniature Tactile Pushbutton Switch, Round Actuator Length = 5.74mm, FSMRAJ Serie", Part Description="Right Angle Micro Miniature Tactile Pushbutton Switch, Round Actuator Length = 5.74mm, FSMRAJ Serie", Part Number=PB_TYCO_1-1825027-1, Pin Count=4, PressFit=No, Sense=No, SMD=No, Socket=No, Status=None
Q1: library part XTAL_25MHZ_TXC_AA-25.000MALE-T, "Quartz Crystal", Manufacturer="TXC CORPORATION", Manufacturer Part Number=AA-25.000MALE-T, Author=GK, Bonding=No, Component Type=Standard, ComponentHeight=1.2mm, CreateDate=28.08.2018, HelpURL=\\cern.ch\dfs\Applications\Altium\Datasheets\XTAL_TXC_AA.pdf, LatestRevisionDate=28.08.2018, Mounted=Yes, PackageDescription="SMD Glass Seam Sealing Crystal, 2 Pins, 3.20mm L X 5.00mm W, AA Serie", Part Description="Tolerance: ± 30ppm, Stability: ±50ppm, -40°C to +85°C, 8pF, SMD Glass Sealing Crystal, AA Series", Part Number=XTAL_25MHZ_TXC_AA-25.000MALE-T, Pin Count=2, PressFit=No, Sense=No, SMD=Yes, Socket=No
R1 R2 R3 R4 R5: library part R0402_1M_1%_0.0625W_100PPM, "Resistor - 1%", Case=0402, Manufacturer=GENERIC, Manufacturer1 ComponentHeight=0.4mm, Manufacturer1 Example="YAGEO PHYCOMP", Manufacturer1 Part Number=232270671005L, Power=0.0625W, Tolerance=±1%, Author="CERN DEM JLC", Component Type=Standard, CreateDate=03.12.2007, HelpURL=\\cern.ch\dfs\Applications\Altium\Datasheets\R0402_Phycomp_RC0402.pdf, LatestRevisionDate=17.10.2012, Manufacturer Part Number=R0402_1M_1%_0.0625W_100PPM, Mounted=Yes, Part Description="General Purpose Thick Film Chip Resistor", Part Number=R0402_1M_1%_0.0625W_100PPM, Pin Count=2, Sense=No, SMD=Yes, Socket=No, Status="Not recommended", TC=±100ppm/°C
R7 R8 R11 R12: library part R0402_49R9_1%_0.0625W_100PPM, "Resistor - 1%", Case=0402, Manufacturer=GENERIC, Manufacturer1 ComponentHeight=0.4mm, Manufacturer1 Example="YAGEO PHYCOMP", Manufacturer1 Part Number="232270674999L or RC0402FR-0749R9L", Power=0.0625W, Tolerance=±1%, Author="CERN DEM JLC", Component Type=Standard, CreateDate=2012-10-24, HelpURL=\\cern.ch\dfs\Applications\Altium\Datasheets\R0402_Phycomp_RC0402.pdf, LatestRevisionDate=2012-10-24, Manufacturer Part Number=R0402_49R9_1%_0.0625W_100PPM, Mounted=Yes, Part Description="General Purpose Thick Film Chip Resistor", Part Number=R0402_49R9_1%_0.0625W_100PPM, Pin Count=2, SMD=Yes, Socket=No, Status="Not recommended", Table="Resistors SMD", TC=±100ppm/°C
R9: library part R0402_10R_1%_0.0625W_200PPM, "Resistor - 1%", Case=0402, Manufacturer=GENERIC, Manufacturer1 ComponentHeight=0.4mm, Manufacturer1 Example="YAGEO PHYCOMP", Manufacturer1 Part Number=232270671009L, Power=0.0625W, Tolerance=±1%, Author="CERN DEM JLC", Component Type=Standard, CreateDate=24.06.2009, HelpURL=\\cern.ch\dfs\Applications\Altium\Datasheets\R0402_Phycomp_RC0402.pdf, LatestRevisionDate=17.10.2012, Manufacturer Part Number=R0402_10R_1%_0.0625W_200PPM, Mounted=Yes, Part Description="General Purpose Thick Film Chip Resistor", Part Number=R0402_10R_1%_0.0625W_200PPM, Pin Count=2, Sense=No, SMD=Yes, Socket=No, Status="Not recommended", TC=±200ppm/°C
R10: library part R0603_12K4_0.1%_0.063W_10PPM, "Resistor - 0.1%", Case=0603, Manufacturer=GENERIC, Manufacturer1 ComponentHeight=0.5mm, Manufacturer1 Example="TYCO HOLSWORTHY", Manufacturer1 Part Number=RN73C1J12K4BTDF, Power=0.063W, Tolerance=±0.1%, Author="CERN DEM JLC", Component Type=Standard, CreateDate=03.12.2007, HelpURL=\\cern.ch\dfs\Applications\Altium\Datasheets\R0603_Tyco_RN73.pdf, LatestRevisionDate=13.03.2008, Manufacturer Part Number=R0603_12K4_0.1%_0.063W_10PPM, Mounted=Yes, Part Description="Thin Film Chip Resistor", Part Number=R0603_12K4_0.1%_0.063W_10PPM, Pin Count=2, Sense=No, SMD=Yes, Socket=No, Status="Not recommended", TC=±10ppm
R13 R14 R15 R16 R17 R18 R19 R20 R21 R22 R23 R24 R25 R26 R27 R28 R29 R30 R31 R32 R33 R34 R35 R36: library part R0603_330R_1%_0.1W_100PPM, "Resistor - 1%", Case=0603, Manufacturer=GENERIC, Manufacturer1 ComponentHeight=0.55mm, Manufacturer1 Example="NIC COMPONENT", Manufacturer1 Part Number=NRC06F3300TRF, Power=0.1W, Tolerance=±1%, Author="CERN DEM JLC", Component Type=Standard, CreateDate=2007-12-03, HelpURL=\\cern.ch\dfs\Applications\Altium\Datasheets\R0603_NIC_NRC.pdf, LatestRevisionDate=2008-03-13, Manufacturer Part Number=R0603_330R_1%_0.1W_100PPM, Mounted=Yes, Part Description="General Purpose Thick Film Chip Resistor", Part Number=R0603_330R_1%_0.1W_100PPM, Pin Count=2, SMD=Yes, Socket=No, Status=Preferred, Table="Resistors SMD", TC=±100ppm/°C
SW1: library part SW-TACT_SMD_RA_mini, "Push button", Supplier Part Number 1=1437640, Manufacturer Part Number="KSS241G LFS", Supplier 1=Farnell

## Via types
v1: diameter 0.5, hole 0.2, Top Layer to Bottom Layer, tented both sides, 102 vias
v2: diameter 0.5, hole 0.3, Top Layer to Bottom Layer, tented both sides, 5 vias
v3: diameter 0.5, hole 0.3, Top Layer to Bottom Layer, 1 vias

## Nets (pads, with @x,y where several pads share a name; then routed paths per layer and width w, separated by ;. In a path a pad name is that pad's centre, name@x,y a point inside that pad or via, vN(x,y) a via of type N, cw(c..) or ccw(c..) an arc to the next point about the centre after c; other vN are vias at no path point)
BOOT: C6.2 J4.1 SW1.1 | length 70.6
  Top Layer w0.152: v3(30.662,43.409) 37.102,43.409 37.305,43.612 57.128,43.612 59.948,40.792 59.948,36.525 62.35,34.123 62.35,32.882 60.405,30.937 60.405,20.625 55.884,16.104 54.538,16.104 53.972,15.538 C6.2
  Top Layer w0.305: C6.2 53.972,12.453 54.78,11.645 J4.1
  Bottom Layer w0.152: SW1.1 30.027,41.808 30.662,42.443 v3(30.662,43.409)
GND: C1.2 C2.2 C3.2 C4.1 C5.1 C6.1 C7.2 C8.2 C23.2 C24.1 C25.2 C26.2 C27.2 C28.1 C29.2 C30.2 C31.2 C59.2 C62.1 C63.1 D4.1 IC1.3 IC1.9 IC1.14 IC1.16 IC1.19 IC1.29 IC1.48 IC3.8 IC4.8 IC5.8 J1.8 J1.9 J1.10 J2.5 J2.6 J4.3 J4.5 J4.7 J4.9 J4.11 J4.13 J4.15 J4.25 J4.30 LD1.1 LD1.3 LD1.5 LD2.1 LD2.3 LD2.5 LD3.1 LD3.3 LD3.5 LD4.1 LD4.3 LD4.5 LD5.1 LD5.3 LD5.5 LD6.1 LD6.3 LD6.5 LD7.1 LD7.3 LD7.5 LD8.1 LD8.3 LD8.5 PB2.2 PB2.3 PB2.4 PB3.2 PB3.3 PB3.4 R3.2 R5.2 R10.2 | length 42.2
  Top Layer w0.152: v1(13.2,31.6) C63.1@13.2,32.45 ; v1(16.9,31.6) C62.1@16.9,32.35 ; v1(23.1,22) IC4.8 ; v1(30.85,21.95) IC3.8 ; v1(38.7,20.6) 38.725,20.625 IC5.8
  Top Layer w0.305: D4.1 14.65,26.585 v1(14.667,26.568) ; v1(22.982,14.475) 22.984,14.477 23.784,14.477 C1.2 C1.2@23.962,14.478 ; v1(31.957,12.649) 31.977,12.649 32.363,13.036 32.648,13.036 v1(33.405,13.792) ; C2.2@44.753,14.3 C2.2 v1(45.597,14.3) ; J4.3 52.429,9.459 52.429,13.252 C6.1 ; v1(58.809,17.109) C26.2 ; v1(59.7,15.1) C23.2 ; v1(61,13.8) C27.2 C27.2@61.75,13.8 ; v1(61.2,10.8) C24.1 ; v1(63.047,18.147) 63.047,17.459 63.179,17.327 v1(66.273,17.327) ; v1(63.527,14.873) 63.527,14.827 IC1.19@64.945,14.827 ; C4.1@64.35,3.8 v1(65.2,3.8) ; IC1.16@64.945,16.327 v1(66.373,16.327) ; v1(65.079,24.13) C28.1@65.079,24.979 ; v1(66.3,9.2) C59.2 C59.2@67.15,9.2 ; v1(66.4,3.9) C5.1@67.35,3.9 ; R10.2 v1(66.476,24.276) ; C31.2@67.777,21.173 v1(67.777,21.877) ; IC1.9@68.02,19.402 68.05,19.372 v1(68.05,18.059) ; IC1.29@68.52,10.752 68.52,12.52 v1(68.6,12.6) ; C30.2@70.8,21.75 71.15,21.75 v1(71.3,21.9) ; v1(71,17.8) 71.02,17.82 IC1.3@71.02,19.402 ; IC1.48@73.595,17.827 74.873,17.827 v1(74.8,17.9) ; v2(75.418,13.776) 76.441,13.776 76.863,14.199 v2(76.863,14.824) ; C25.2@75.908,25.019 v1(76.509,25.019) ; v2(76.273,14.784) 76.289,14.768 76.289,13.996 C8.2 C8.2@76.515,13.776 ; v2(76.353,10.342) 76.39,10.38 76.598,10.38 76.909,10.691 R5.2
  other v1: 2.85,11.464 5.313,11.97 7.135,12.007 4.008,12.571 6.269,12.907
INT: IC1.36 J4.12 | length 41.6
  Top Layer w0.152: J4.12 43.25,7.9 45.4,7.9 46,7.3 46,6 47,5 50.2,5 51.365,3.835 55.247,3.835 58.082,1 68.196,1 69.955,2.759 69.955,6.486 72.02,8.551 IC1.36@72.02,10.752
LED_CS: IC3.12 IC4.12 IC5.12 J4.14 | length 37.2
  Top Layer w0.152: IC4.12 26,15.1 27.1,14 28.969,14 30.4,15.431 30.4,17.4 31,18 33.2,18 33.675,17.525 IC3.12 33.675,14.725 34.5,13.9 36.7,13.9 37.763,14.963 37.763,17.08 38.195,17.512 40.288,17.512 40.58,17.22 40.58,16.145 IC5.12 40.675,12.775 38.2,10.3 38.2,8.07 J4.14
LED_GREEN_CH0: IC5.15 R13.1 | length 23.5
  Top Layer w0.152: IC5.15 42.625,17.225 42.7,17.3 51.5,17.3 57.323,23.123 R13.1
LED_GREEN_CH1: IC5.1 R16.1 | length 14.1
  Top Layer w0.152: IC5.1 43.275,22.275 43.7,22.7 50.5,22.7 52.497,24.697 R16.1
LED_GREEN_CH2: IC5.2 R19.1 | length 10.8
  Top Layer w0.152: IC5.2 42.625,23.125 42.9,23.4 v1(47.2,23.4) ; v1(47.2,25.7) 47.2,28.065 R19.1
  Bottom Layer w0.152: v1(47.2,23.4) v1(47.2,25.7)
LED_GREEN_CH3: IC5.3 R22.1 | length 6.4
  Top Layer w0.152: IC5.3 41.975,23.675 v1(42,23.7) ; v1(42,26.1) 42,28.072 R22.1
  Bottom Layer w0.152: v1(42,23.7) v1(42,26.1)
LED_GREEN_CH4: IC5.4 R25.1 | length 8.3
  Top Layer w0.152: R25.1 37.638,26.762 v1(37.8,26.6) ; v1(41.2,23.8) 41.3,23.8 41.325,23.775 IC5.4
  Bottom Layer w0.152: v1(37.8,26.6) 38.4,26.6 v1(41.2,23.8)
LED_GREEN_CH5: IC5.5 R28.1 | length 13.3
  Top Layer w0.152: R28.1 32.177,27.323 32.9,26.6 v1(34.1,26.6) ; v1(34.675,24.714) 34.675,24.784 34.691,24.8 39.1,24.8 40.675,23.225 IC5.5
  Bottom Layer w0.152: v1(34.1,26.6) 34.675,26.025 v1(34.675,24.714)
LED_GREEN_CH6: IC5.6 R31.1 | length 16.5
  Top Layer w0.152: R31.1 27.478,27.722 v1(29.3,25.9) ; v1(32.2,24.2) 32.387,24.387 34.326,24.387 34.477,24.236 34.873,24.236 35.024,24.387 36.193,24.387 36.393,24.187 39.088,24.187 40.025,23.25 IC5.6
  Bottom Layer w0.152: v1(29.3,25.9) 30.72,24.48 31.54,24.48 31.821,24.2 v1(32.2,24.2)
LED_GREEN_CH7: IC5.7 R34.1 | length 21.1
  Top Layer w0.152: R34.1 22.8,27.88 22.8,26.9 v1(24.5,25.2) ; v1(31.3,23.9) 31.679,23.9 31.96,23.62 32.44,23.62 32.801,23.98 34.301,23.98 34.35,23.931 34.999,23.931 35.049,23.98 35.64,23.98 35.84,23.78 38.603,23.78 39.375,23.008 IC5.7
  Bottom Layer w0.152: v1(24.5,25.2) 29.3,25.2 30.6,23.9 v1(31.3,23.9)
LED_OEN: IC3.13 IC4.13 IC5.13 J4.18 | length 44
  Top Layer w0.152: IC4.13 26.65,15.15 27.4,14.4 28.8,14.4 29.762,15.362 29.762,17.362 30.806,18.406 33.368,18.406 34.325,17.45 IC3.13 34.325,14.506 34.531,14.3 36.669,14.3 37.357,14.988 37.357,17.248 38.027,17.918 40.515,17.918 41.325,17.108 IC5.13 41.325,11.025 40.7,10.4 40.7,5.9 40,5.2 35.99,5.2 J4.18
LED_RED_CH0: IC3.15 R15.1 | length 28.1
  Top Layer w0.152: IC3.15 35.625,17.302 36.902,18.579 50.779,18.579 54.275,22.075 R15.1
LED_RED_CH1: IC3.1 R18.1 | length 16.6
  Top Layer w0.152: IC3.1 37.35,21.95 v1(37.4,22) ; v1(45.089,24.943) 45.444,25.298 46.925,25.298 47.002,25.221 47.704,25.221 49.449,26.966 R18.1
  Bottom Layer w0.152: v1(37.4,22) 38.133,22.733 41.253,22.733 41.437,22.917 42.324,22.917 44.351,24.943 v1(45.089,24.943)
LED_RED_CH2: IC3.2 R21.1 | length 13.7
  Top Layer w0.152: IC3.2 35.625,22.905 35.88,23.16 35.88,23.18 37.78,23.18 v1(37.8,23.2) ; R21.1 44.4,28.251 v1(44.4,27)
  Bottom Layer w0.152: v1(37.8,23.2) 37.88,23.12 41.209,23.12 41.311,23.221 42.198,23.221 44.4,25.423 v1(44.4,27)
LED_RED_CH3: IC3.3 R24.1 | length 9.4
  Top Layer w0.152: IC3.3 35.009,21.984 35.009,23.209 35.2,23.4 v1(35.3,23.4) ; v1(38.307,27.178) 39.162,28.033 R24.1
  Bottom Layer w0.152: v1(35.3,23.4) 35.3,26.33 36.15,27.18 v1@38.307,27.18
LED_RED_CH4: IC3.4 R27.1 | length 7.4
  Top Layer w0.152: v1(33.4,27.2) 34.482,28.282 R27.1 ; IC3.4 34.325,23.267 v1(34.429,23.371)
  Bottom Layer w0.152: v1(33.4,27.2) 33.4,24.4 v1(34.429,23.371)
LED_RED_CH5: IC3.5 R30.1 | length 8.9
  Top Layer w0.152: R30.1 29.129,27.071 v1(29.4,26.8) ; IC3.5 v1(33.675,23.325)
  Bottom Layer w0.152: v1(29.4,26.8) 29.4,26.621 31.134,24.887 32.334,24.887 33.675,23.546 v1(33.675,23.325)
LED_RED_CH6: IC3.6 R33.1 | length 14.6
  Top Layer w0.152: R33.1 24.5,28.212 v1(24.5,26.2) ; v1(32.9,23.2) 33,23.2 33.025,23.175 IC3.6
  Bottom Layer w0.152: v1(24.5,26.2) 23.956,25.656 23.956,25.067 24.302,24.721 24.698,24.721 24.716,24.74 29.329,24.74 30.474,23.595 30.511,23.595 30.906,23.2 v1(32.9,23.2)
LED_RED_CH7: IC3.7 R36.1 | length 17.2
  Top Layer w0.152: R36.1 19.35,26.55 v1(22.9,23) ; v1(29.5,23) 31.358,23 31.363,23.005 32.274,23.005 32.375,22.904 IC3.7
  Bottom Layer w0.152: v1(22.9,23) v1(29.5,23)
LED_SCK: IC3.11 IC4.11 IC5.11 J4.16 | length 32.9
  Top Layer w0.152: IC4.11 25.35,15.05 26.8,13.6 29,13.6 30.9,15.5 30.9,16.9 31.594,17.594 32.806,17.594 33.025,17.375 IC3.11 33.025,14.475 33.229,14.271 33.603,14.271 33.883,13.99 33.883,13.617 33.906,13.594 35.8,13.594 ; J4.16 35.8,7.93 35.8,13.594 ; IC5.11@39.93,16.699 39.93,16.912 39.737,17.105 38.363,17.105 38.17,16.912 38.17,14.27 37.494,13.594 35.8,13.594
LED_SDI: IC3.14 J4.17 | length 10.2
  Top Layer w0.152: J4.17 34.46,12.86 v1(34.7,13.1) ; IC3.14 34.975,17.475 v1(35.1,17.6)
  Bottom Layer w0.152: v1(34.7,13.1) 35.1,13.5 v1(35.1,17.6)
LED_YELLOW_CH0: IC4.15 R14.1 | length 36.7
  Top Layer w0.152: IC4.15 27.95,17.45 29.7,19.2 49.7,19.2 53.5,23 v1(53.5,26.3) ; v1(55.7,26.3) 55.799,26.399 R14.1
  Bottom Layer w0.152: v1(53.5,26.3) v1(55.7,26.3)
LED_YELLOW_CH1: IC4.1 R17.1 | length 27.2
  Top Layer w0.152: IC4.1 28.6,23 29.18,23.58 30.16,23.58 31.772,25.193 39.282,25.193 40.011,24.464 48.964,24.464 50.973,26.473 R17.1
LED_YELLOW_CH2: IC4.2 R20.1 | length 21.8
  Top Layer w0.152: IC4.2 27.95,23.058 28.879,23.987 29.991,23.987 31.502,25.498 37.359,25.498 37.381,25.52 44.189,25.52 45.893,27.224 R20.1
LED_YELLOW_CH3: IC4.3 R23.1 | length 17.4
  Top Layer w0.152: IC4.3 27.3,23.425 28.268,24.393 29.823,24.393 31.232,25.802 37.233,25.802 37.45,26.02 39.482,26.02 40.686,27.224 R23.1
LED_YELLOW_CH4: IC4.4 R26.1 | length 13.5
  Top Layer w0.152: IC4.4 26.65,23.35 28.099,24.799 29.655,24.799 30.977,26.121 35.011,26.121 36.114,27.224 R26.1
LED_YELLOW_CH5: IC4.5 R29.1 | length 9.3
  Top Layer w0.152: IC4.5 26,23.7 27.506,25.206 29.426,25.206 30.653,26.432 R29.1
LED_YELLOW_CH6: IC4.6 R32.1 | length 6.5
  Top Layer w0.152: IC4.6 25.35,24.85 25.954,25.454 R32.1
LED_YELLOW_CH7: IC4.7 R35.1 | length 7.9
  Top Layer w0.152: R35.1 20.874,27.026 24.7,23.2 IC4.7
NetB1_1: B1.1 C7.1 R2.1 | length 8
  Top Layer w0.152: B1.1 4,8.164 4.068,8.232 C7.1 5.846,9.666 6.232,9.28 R2.1
NetB2_1: B2.1 C8.1 R4.1 | length 10.2
  Top Layer w0.152: B2.1 76.929,6.929 R4.1 76.715,8.186 76.349,8.186 75.874,8.66 75.874,11.477 76.373,11.976 C8.1
NetC4_2: C4.2 IC1.30 Q1.1 R1.1 | length 11.7
  Top Layer w0.152: C4.2@63.45,3.8 63.45,6.45 Q1.1@63.6,6.6 ; Q1.1 63.686,7.606 64.208,8.128 67.827,8.128 69.02,9.321 IC1.30@69.02,10.752
NetC5_2: C5.2 IC1.31 Q1.2 R1.2 | length 8.1
  Top Layer w0.152: C5.2 68.145,5.464 Q1.2 67.386,6.573 68.5,7.687 68.5,7.892 69.52,8.912 IC1.31@69.52,10.752 ; C5.2@68.25,3.9 C5.2@68.25,3.988
NetC23_1: C23.1 IC1.20 | length 2.9
  Top Layer w0.305: C23.1 63.132,14.318 64.936,14.318 IC1.20@64.945,14.327
NetC24_2: C24.2 IC1.22 | length 3.3
  Top Layer w0.305: C24.2 62.8,12.8 63.327,13.327 IC1.22@64.945,13.327
NetC25_1: C25.1 J1.2 R9.2 | length 6.2
  Top Layer w0.254: v1(74.883,26.924) 74.95,26.857 74.95,26.3 75.03,26.22 C25.1@75.03,25.3 ; C25.1 75.048,25.014 R9.2
  Bottom Layer w0.254: J1.2 72.506,26.924 v1(74.883,26.924)
NetC28_2: C28.2 J1.5 R11.1 R12.1 | length 13.1
  Top Layer w0.254: J1.5 67.632,30.012 66.767,30.012 65.282,28.527 65.282,26.568 C28.2 67.102,24.747 R11.1@67.923,24.747 ; R11.1 R11.1@67.923,24.747 ; R12.1 72.116,24.754 70.207,24.754 70.2,24.747 R11.1@67.923,24.747
NetC62_2: C62.2 FB5.1 J4.29 | length 42.3
  Top Layer w0.152: FB5.1@18,34.6 17.4,34 16.9,34 16.9,33.05 17.532,33.05 17.816,32.766 17.816,25.493 17.521,25.198 17.521,17.548 23.174,11.895 23.364,11.895 25.556,9.703 25.556,8.484 24.972,7.899 23.6,7.899 23.067,7.366 23.067,6.223 22.229,5.385 20.984,5.385 20.527,5.842 20.527,7.963 J4.29
NetC63_2: C63.2 D4.4 FB4.1 J4.26 | length 43
  Top Layer w0.457: FB4.1 11.85,33.25 C63.2 ; 12.5,28.008 12.5,8.027 15.93,4.597 22.168,4.597 J4.26 ; 12.508,28.008 D4.4 14.45,30.29 13.955,30.785 13.955,33.223 13.273,33.223 13.2,33.15 C63.2@13.124,33.226
NetD4_2: D4.2 J4.28 L1.3 | length 29.4
  Top Layer w0.152: L1.3 16.129,31.55 16.98,30.699 16.98,28.58 16.35,27.95 D4.2 16.35,17.55 23.1,10.8 23.1,8.07 J4.28
NetD4_3: D4.3 J4.27 L1.2 | length 26.2
  Top Layer w0.152: L1.2 14.7,31.233 15.163,30.77 15.163,30.437 15.65,29.95 D4.3 16.35,29.75 15.7,29.1 15.7,17.4 21.76,11.34 J4.27
NetFB4_2: FB4.2 J2.1 | length 18.2
  Top Layer w0.5: FB4.2 11.6,35.5 v1(12.5,35.5)
  Bottom Layer w0.4: 22.8,39.332 J2.1
  Bottom Layer w0.5: v1(12.5,35.5) 14,34 20.242,34 20.258,34.015 21.15,34.015 21.166,34 21.5,34 22,34.5 22,38.532 22.8,39.332
NetFB5_2: FB5.2 J2.4 | length 6.3
  Top Layer w0.5: FB5.2@18,36.4 18.9,36.4 v1(19,36.5)
  Bottom Layer w0.5: v1(19,36.5) 19,38 20.85,39.85 J2.4
NetIC1_10: IC1.10 R10.1 | length 2.8
  Top Layer w0.152: R10.1 66.476,20.904 66.924,20.456 67.177,20.456 67.52,20.112 IC1.10@67.52,19.402
NetIC3_9: IC3.9 IC4.14 | length 8.7
  Top Layer w0.152: IC4.14 v1(27.3,17.7) ; v1(30.7,14.6) 31.6,14.6 31.725,14.725 IC3.9
  Bottom Layer w0.152: v1(27.3,17.7) 30.364,14.636 30.664,14.636 v1(30.7,14.6)
NetIC4_9: IC4.9 IC5.14 | length 23.6
  Top Layer w0.152: IC4.9 24.05,17.35 26.4,19.7 v1(37.1,19.7) ; v1(37.1,18.1) 37.223,18.223 41.377,18.223 41.975,17.625 IC5.14
  Bottom Layer w0.152: v1(37.1,18.1) v1(37.1,19.7)
NetJ2_2: J2.2 L1.1 | length 13
  Top Layer w0.152: L1.1 14.7,33.942 15.149,34.392 15.149,36.149 16.236,37.236 18.213,37.236 20.49,39.512 20.72,39.512 20.955,39.747 22.03,39.747 v1(22.127,39.649)
  Bottom Layer w0.152: v1(22.127,39.649) 22.127,39.772 22.15,39.794 J2.2
NetJ2_3: J2.3 L1.4 | length 11.8
  Top Layer w0.152: L1.4 15.5,36 16.432,36.932 18.34,36.932 20.616,39.208 21.431,39.208 v1(21.492,39.268)
  Bottom Layer w0.152: v1(21.492,39.268) 21.492,40.992 J2.3
NetJ4_19: J4.19 PB2.1 | length 52.4
  Top Layer w0.152: PB2.1@2.75,41.5 PB2.1 2.75,40.993 9,34.743 9,27.5 v1(11.5,25) ; v1@18,24.892 18.5,24.392 18.5,17 23.3,12.2 30.8,12.2 31.92,11.08 J4.19
  Bottom Layer w0.152: v1(11.5,25) v1(18,25)
NetJ4_20: J4.20 PB3.1 | length 54.9
  Top Layer w0.152: v1(11.5,26) 9.5,28 9.5,36 10.475,36.975 10.975,36.975 11.75,37.75 PB3.1 PB3.1@11.75,41.5 ; v1(18.5,26) 18.521,25.979 18.521,24.802 18.805,24.518 18.805,17.195 23.427,12.573 31.002,12.573 33.2,10.375 33.2,8.01 J4.20
  Bottom Layer w0.152: v1(11.5,26) v1(18.5,26)
NetLD1_2: LD1.2 R13.2 | length 8.9
  Top Layer w0.152: LD1.2 56.4,36.993 56.4,35.4 56.9,34.9 56.9,31.4 57.323,30.977 R13.2
NetLD1_4: LD1.4 R14.2 | length 6.3
  Top Layer w0.152: LD1.4 56.38,34.473 56.38,32.08 55.799,31.499 R14.2
NetLD1_6: LD1.6 R15.2 | length 3.5
  Top Layer w0.152: R15.2 54.275,30.975 55.375,32.075 LD1.6
NetLD2_2: LD2.2 R16.2 | length 9
  Top Layer w0.152: LD2.2 51.8,36.64 51.8,35.1 51.957,34.943 51.957,31.943 52.497,31.403 R16.2
NetLD2_4: LD2.4 R17.2 | length 6.2
  Top Layer w0.152: LD2.4 51.427,34.473 51.427,31.627 50.973,31.173 R17.2
NetLD2_6: LD2.6 R18.2 | length 3.5
  Top Layer w0.152: R18.2 49.449,30.749 50.422,31.722 LD2.6
NetLD3_2: LD3.2 R19.2 | length 8.9
  Top Layer w0.152: LD3.2 46.8,36.687 46.8,34.8 46.881,34.719 46.881,31.357 47.417,30.821 R19.2
NetLD3_4: LD3.4 R20.2 | length 6.3
  Top Layer w0.152: LD3.4 45.469,34.831 46.25,34.05 46.25,33.803 46.474,33.579 46.474,32.522 45.893,31.94 R20.2
NetLD3_6: LD3.6 R21.2 | length 3.5
  Top Layer w0.152: R21.2 44.369,30.769 45.469,31.869 LD3.6
NetLD4_2: LD4.2 R22.2 | length 8.8
  Top Layer w0.152: LD4.2 41.6,36.934 41.6,34.8 42,34.4 42,30.092 R22.2
NetLD4_4: LD4.4 R23.2 | length 6.4
  Top Layer w0.152: LD4.4 40.516,34.36 41.521,33.354 41.521,32.522 40.686,31.686 R23.2
NetLD4_6: LD4.6 R24.2 | length 3.6
  Top Layer w0.152: R24.2 39.162,30.962 40.516,32.316 LD4.6
NetLD5_2: LD5.2 R25.2 | length 9
  Top Layer w0.152: LD5.2 36.9,36.681 36.9,34.7 36.975,34.625 36.975,31.725 37.638,31.062 R25.2
NetLD5_4: LD5.4 R26.2 | length 6.2
  Top Layer w0.152: LD5.4 35.563,34.937 36.568,33.932 36.568,31.768 36.114,31.314 R26.2
NetLD5_6: LD5.6 R27.2 | length 3.5
  Top Layer w0.152: R27.2 34.59,30.89 35.563,31.863 LD5.6
NetLD6_2: LD6.2 R28.2 | length 8.8
  Top Layer w0.152: LD6.2 30.61,37.19 32.022,35.778 32.022,30.037 R28.2
NetLD6_4: LD6.4 R29.2 | length 6.4
  Top Layer w0.152: LD6.4 31.615,34.473 31.615,32.315 30.653,31.353 R29.2
NetLD6_6: LD6.6 R30.2 | length 3.7
  Top Layer w0.152: R30.2 29.129,30.929 30.61,32.41 LD6.6
NetLD7_2: LD7.2 R31.2 | length 8.9
  Top Layer w0.152: LD7.2 26.7,36.975 26.7,34.5 27.192,34.008 27.192,32.513 27.2,32.505 27.2,31.3 27.478,31.022 R31.2
NetLD7_4: LD7.4 R32.2 | length 6.3
  Top Layer w0.152: LD7.4 25.657,34.36 26.662,33.354 26.662,31.962 25.954,31.254 R32.2
NetLD7_6: LD7.6 R33.2 | length 3.6
  Top Layer w0.152: R33.2 24.43,30.73 25.657,31.957 LD7.6
NetLD8_2: LD8.2 R34.2 | length 8.9
  Top Layer w0.152: LD8.2 21.709,37.013 21.709,35.391 22.239,34.861 22.239,29.882 R34.2
NetLD8_4: LD8.4 R35.2 | length 6.4
  Top Layer w0.152: LD8.4 21.709,34.473 21.709,32.412 21.6,32.303 21.6,31.9 20.874,31.174 R35.2
NetLD8_6: LD8.6 R36.2 | length 3.6
  Top Layer w0.152: R36.2 19.35,31.584 LD8.6
NetR2_2: R2.2 R3.1 | length 0.8
  Top Layer w0.152: R2.2 R3.1
NetR4_2: R4.2 R5.1 | length 0.8
  Top Layer w0.152: R4.2 R5.1
P3V3: C1.1 C2.1 C3.1 C59.1 FB3.1 IC1.28 IC1.43 IC1.44 IC1.45 IC3.10 IC3.16 IC4.10 IC4.16 IC5.10 IC5.16 J1.D1 J1.D3 J4.21 J4.22 SW1.2 | length 243.9
  Top Layer w0.305: v1(61.2,5.232) 61.2,8 62.2,9 65.715,9 66.206,8.509 67.669,8.509 67.85,8.69 67.85,9.2 68.02,9.37 IC1.28@68.02,10.752 ; J1.D3@62.191,40.208 62.191,43.191 63,44 68.2,44 69.752,42.448 74.179,42.448 74.792,41.834 74.84,41.834 J1.D1@74.689,41.683 ; IC1.43@73.595,15.327 75.227,15.327 ; IC1.44@73.595,15.827 75.632,15.827 FB3.1@75.727,15.827 ; IC1.45@73.595,16.327 75.773,16.327 FB3.1 ; J1.D1 74.85,40.216 71.505,36.871 71.505,35.535 77.3,29.739 77.3,17.3 FB3.1@76.3,16.3
  Top Layer w0.457: IC4.10 24.7,14.4 26.043,13.057 v1(29.204,13.057) v1(29.925,13.778) 32.375,13.778 IC3.10 ; v1(28.6,14.9) IC4.16 ; IC3.16 36.275,14.825 v1(36.3,14.8) ; v2(36.275,41.935) 37.494,43.155 56.443,43.155 59.186,40.411 59.186,22.047 53.189,16.05 IC5.16 43.275,14.325 43.852,14.325 C2.1 43.81,14.233 43.345,14.233 v1(43.337,14.225) ; v1(36.427,12.954) 38.739,12.954 39.375,13.59 v1(39.375,14.225) IC5.10 ; v1(74.07,8.103) 74.634,8.666 74.634,8.692 75.227,9.285 75.227,12.32 74.787,12.759 74.787,14.038 75.227,14.477 75.227,14.854 ; 75.227,15.327 75.227,14.854 ; FB3.1 75.905,16.1 75.632,15.827 75.559,15.754 75.559,15.186 75.227,14.854